# EAGLE board Boardv2 (EAGLE 9.3.1)

Size 160 x 100 mm. Coordinates in mm from the lower left corner, seen from the top.
Outline: 0,0 160,0 160,100 0,100 0,0
Copper layers (1*16): Top 0.035mm / dielectric 1.5mm / Bottom 0.035mm
Design rules "default": minimum track width 6mil, minimum drill 0.35mm, track to track 6mil, track to pad 6mil, pad to pad 6mil, via to via 6mil, smd to smd 6mil, copper to edge 40mil, drill to drill 6mil, minimum pad ring 10mil, minimum via ring 8mil, stop-mask expansion 4mil, vias tented up to drill 0mil, thermal gap 10mil
Net classes: 0 default: width 0.762 mm

## Footprints (pad centres in the part's own frame; a part is rotated, then mirrored left to right if it is on the bottom)
1X03_NO_SILK = drill 1.016 long: 1 0,0; 2 2.54,0; 3 5.08,0
1X02_LONGPADS = drill 1.016 long: 1 0,0; 2 2.54,0
1X06_NO_SILK = drill 1.016 long: 1 0,0; 2 2.54,0; 3 5.08,0; 4 7.62,0; 5 10.16,0; 6 12.7,0
TACTILE_SWITCH_PTH_6.0MM = drill 1.016 long: 1 -3.251,2.261; 2 3.251,2.261; 3 -3.251,-2.261; 4 3.251,-2.261
AXIAL-0.3 = drill 1.016 long: P$1 -3.81,0; P$2 3.81,0
ATMEGA328 = drill 1.016 long: 1 1.27,1.27; 2 3.81,1.27; 3 6.35,1.27; 4 8.89,1.27; 5 11.43,1.27; 6 13.97,1.27; 7 16.51,1.27; 8 19.05,1.27; 9 21.59,1.27; 10 24.13,1.27; 11 26.67,1.27; 12 29.21,1.27; 13 31.75,1.27; 14 34.29,1.27; 15 34.29,8.89; 16 31.75,8.89; 17 29.21,8.89; 18 26.67,8.89; 19 24.13,8.89; 20 21.59,8.89; 21 19.05,8.89; 22 16.51,8.89; 23 13.97,8.89; 24 11.43,8.89; 25 8.89,8.89; 26 6.35,8.89; 27 3.81,8.89; 28 1.27,8.89
USB = drill 1.016 long: 5V 5.08,-2.54; D+ 0,-2.54; D- 2.54,-2.54; GND -5.08,-2.54; ID -2.54,-2.54
OLED = drill 1.016 long: CLK 3.81,2.54; CS 8.89,2.54; DATA 1.27,2.54; GND 16.51,2.54; RST 11.43,2.54; SA0 6.35,2.54; VIN 13.97,2.54

## Placement (x,y rotation side)
16.00MX  RESONATOR  [1X03_NO_SILK]  -35.56,39.37 0 top  (outside the outline)
ANIM1  LED  [1X02_LONGPADS]  -26.67,26.67 0 top  (outside the outline)
ANIM2  LED  [1X02_LONGPADS]  -33.02,26.67 0 top  (outside the outline)
ANIMJUMP  LED  [1X02_LONGPADS]  -39.37,26.67 0 top  (outside the outline)
NEOPIXEL  1X3  [1X03_NO_SILK]  -44.45,39.37 0 top  (outside the outline)
PIEZO  1X2  [1X02_LONGPADS]  -45.72,26.67 0 top  (outside the outline)
PROGRAMMING  1X6  [1X06_NO_SILK]  -26.67,39.37 0 top  (outside the outline)
RESET  MOMENTARY_SWITCH  [TACTILE_SWITCH_PTH_6.0MM]  -44.45,16.51 0 top  (outside the outline)
RESISTOR  10k  [AXIAL-0.3]  -17.78,44.45 0 top  (outside the outline)
RESISTOR1  10k  [AXIAL-0.3]  -27.94,44.45 0 top  (outside the outline)
RESISTOR2  470  [AXIAL-0.3]  -38.1,44.45 0 top  (outside the outline)
RESISTOR3  470  [AXIAL-0.3]  -17.78,48.26 0 top  (outside the outline)
RESISTOR4  470  [AXIAL-0.3]  -27.94,48.26 0 top  (outside the outline)
U$1  ATMEGA328  [ATMEGA328]  -49.53,1.27 0 top  (outside the outline)
U$2  USB  [USB]  -24.13,16.51 0 top  (outside the outline)
U$5  BUTTON(OFFBOARD)  [1X02_LONGPADS]  -20.32,26.67 0 top  (outside the outline)
U$6  OLED  [OLED]  -36.83,31.75 0 top  (outside the outline)
U$7  CAPACITOR  [1X02_LONGPADS]  -16.51,33.02 0 top  (outside the outline)

## Library data of the parts
16.00MX ANIM1 ANIM2 ANIMJUMP NEOPIXEL PIEZO PROGRAMMING RESET RESISTOR RESISTOR1-RESISTOR4 U$1 U$2 U$5-U$7 = FroggyRun

## Nets
5V: NEOPIXEL.1 PROGRAMMING.4 RESISTOR.P$2 U$1.7 U$1.20 U$2.5V U$5.2 U$6.VIN U$7.1
ANIM1: ANIM1.1 U$1.4
ANIM2: ANIM2.1 U$1.5
ANIMJUMP: ANIMJUMP.1 U$1.6
GND: 16.00MX.2 NEOPIXEL.3 PIEZO.2 PROGRAMMING.6 RESET.1 RESET.3 RESISTOR1.P$2 RESISTOR2.P$2 RESISTOR3.P$2 RESISTOR4.P$2 U$1.8 U$1.21 U$2.GND U$6.GND U$7.2
N$1: ANIM1.2 RESISTOR2.P$1
N$2: ANIM2.2 RESISTOR3.P$1
N$3: PROGRAMMING.3 U$1.2
N$4: ANIMJUMP.2 RESISTOR4.P$1
N$5: RESISTOR1.P$1 U$1.11 U$5.1
N$6: 16.00MX.1 U$1.9
N$7: 16.00MX.3 U$1.10
N$8: U$1.15 U$6.DATA
N$9: U$1.16 U$6.CLK
N$10: U$1.17 U$6.SA0
N$11: U$1.18 U$6.CS
N$12: U$1.19 U$6.RST
NEOPIXEL: NEOPIXEL.2 U$1.12
PIEZO: PIEZO.1 U$1.13
PROGRAMMING: PROGRAMMING.2 U$1.3
RESET: RESET.2 RESET.4 RESISTOR.P$1 U$1.1

## Tracks (layer width: path | path; a pad name or v marks a point on that pad's centre or on a via)
5V  (8 unrouted)
ANIM1  (1 unrouted)
ANIM2  (1 unrouted)
ANIMJUMP  (1 unrouted)
GND  (14 unrouted)
N$1  (1 unrouted)
N$2  (1 unrouted)
N$3  (1 unrouted)
N$4  (1 unrouted)
N$5  (2 unrouted)
N$6  (1 unrouted)
N$7  (1 unrouted)
N$8  (1 unrouted)
N$9  (1 unrouted)
N$10  (1 unrouted)
N$11  (1 unrouted)
N$12  (1 unrouted)
NEOPIXEL  (1 unrouted)
PIEZO  (1 unrouted)
PROGRAMMING  (1 unrouted)
RESET  (3 unrouted)